# Altium PCB EVB_DBM_ADT07029BM30_V1.0.0.PcbDoc
Units mil, origin at the board's own origin, x right, y up, seen from the top; angles counter-clockwise.
Board outline 7010 x 3937.01 mil, 4 copper layers (TOP, L2, L3, BOTTOM), stack 35.4 mil thick; 120 components, 85 nets, 382 pads, 521 vias.
Unrouted connection lines stored in the file: 447.
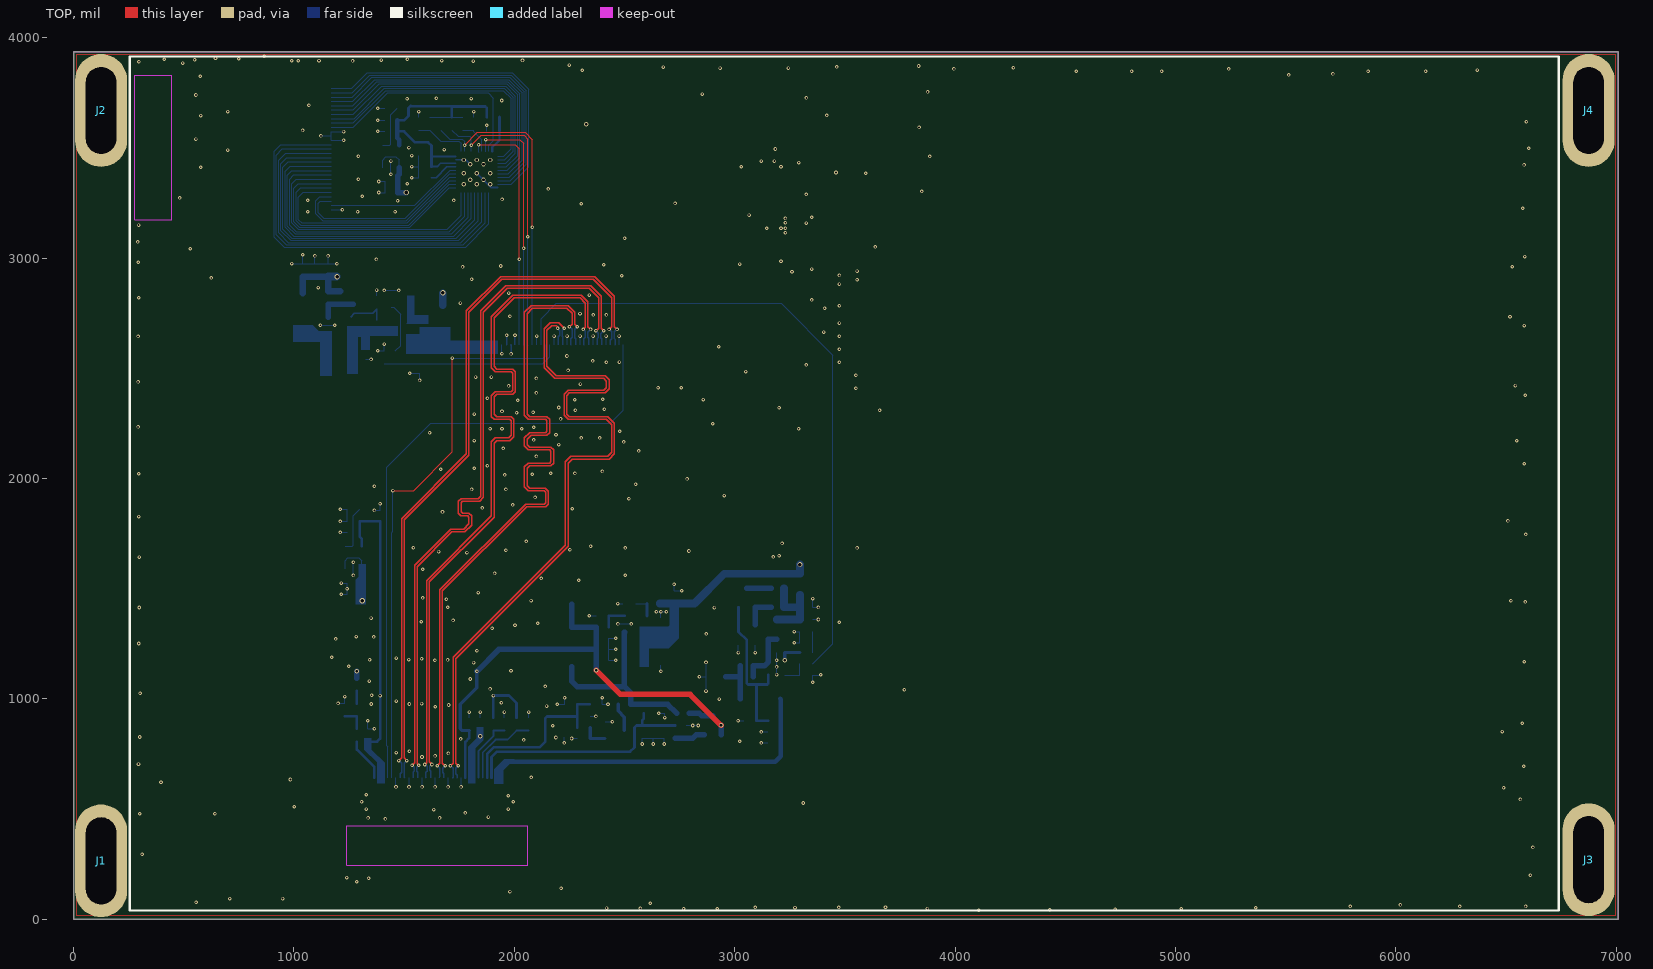
[diagram p0: TOP view]
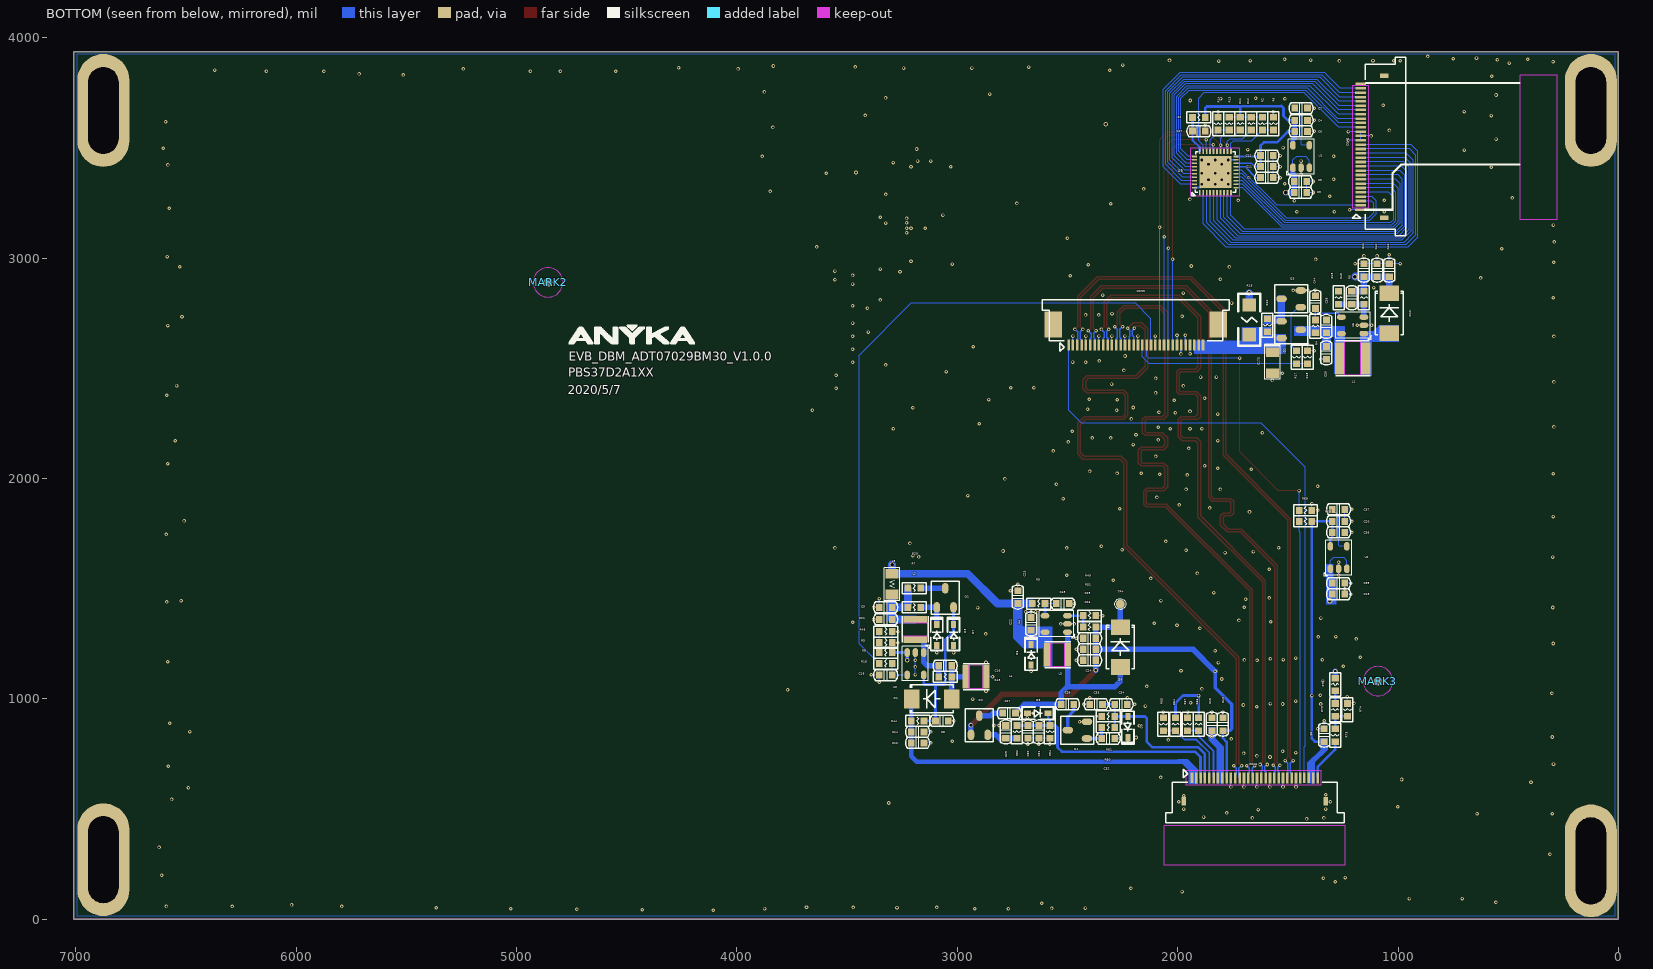
[diagram p1: BOTTOM view, seen from below]
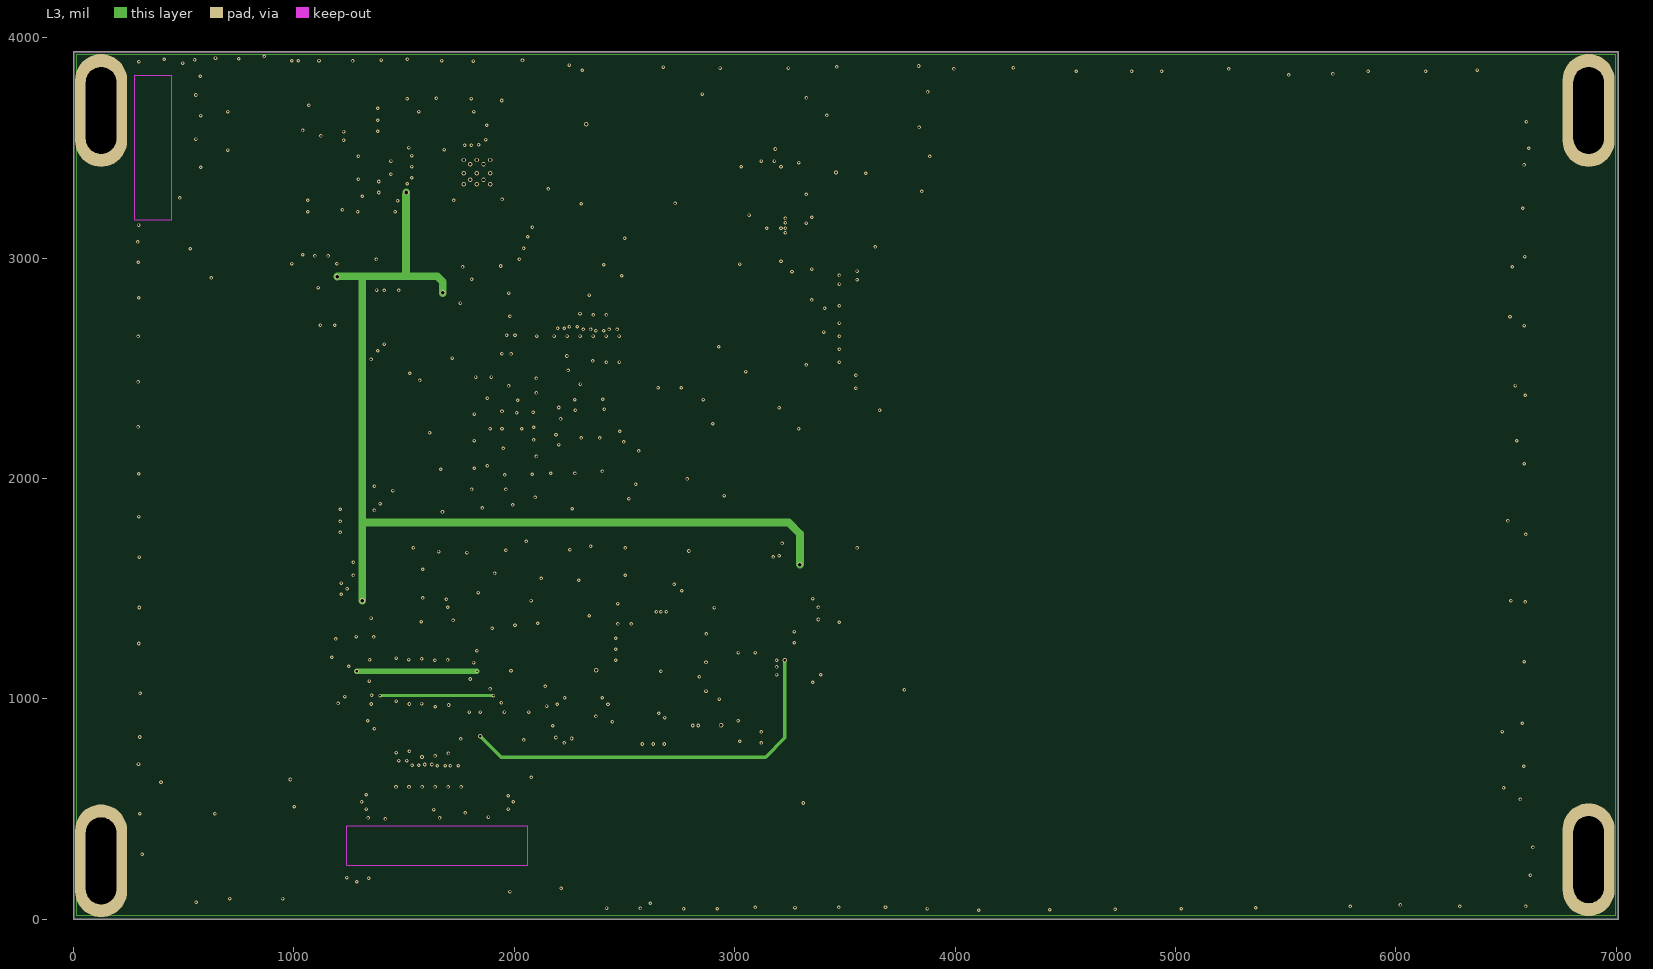
[diagram p2: L3]

## Layer stack, top to bottom
Top Solder: solder mask 0.4, Solder Resist, Dk 3.5
TOP: signal copper 1.35
Dielectric 1: dielectric 10, FR-4, Dk 4.3
L2: signal copper 1.35
Dielectric2: dielectric 10, FR-4, Dk 4.3
L3: signal copper 1.35
Dielectric3: dielectric 10, FR-4, Dk 4.3
BOTTOM: signal copper 1.35
Bottom Solder: solder mask 0.4, Solder Resist, Dk 3.5

## Board outline
0,0 7010,0 7010,3937.01 0,3937.01

## Design rules (kind name [scope] priority, off if disabled: settings)
Clearance "Clearance - Default - DEFAULT- SMD" [IsVia vs IsSMTPin] p1: gap=6 ignorepadtopadclearanceinfootprint=FALSE
Clearance "Clearance - Default - DEFAULT - Via" [IsVia vs IsVia] p2: gap=6 ignorepadtopadclearanceinfootprint=FALSE
Clearance "Clearance - Default - DEFAULT - Net" [All] p3: gap=6 ignorepadtopadclearanceinfootprint=FALSE except(0: Arc-Hole Track-Hole SMDPad-Hole THPad-Hole Via-Hole Fill-Hole Poly-Hole Region-Hole Text-Hole; 5: Arc-Arc Arc-Track Track-Track; 10: Text-Text)
ComponentClearance "ComponentClearance - Default - DEFAULT" [All] p1: gap=6 collisioncheckmode=3 verticalgap=10 showdistances=FALSE
FanoutControl Fanout_Small [(CompPinCount < 5)] p3: bgadir=Out bgaviamode=Centered fanoutstyle=Auto fanoutdirection=OutThenIn viagrid=1 // Fanout_Small (Default Rule)
FanoutControl Fanout_SOIC [IsSOIC] p4: bgadir=Out bgaviamode=Centered fanoutstyle=Auto fanoutdirection=Alternating viagrid=1 // Fanout_SOIC (Default Rule)
HoleToHoleClearance "HoleToHoleClearance - Default - DEFAULT" [All] p1: gap=6 allowstackedmicrovias=TRUE
Length "Default Length" [All] p1: maxlimit=50000 minlimit=0
MaxMinImpedance "Default Impedance" [All] p1: minimum=50.00 maximum=150.0
ParallelSegment "Default Parallel Segment Adjasent" [All] p1: limit=1000 gap=200
ParallelSegment "Default Parallel Segment Same Layer" [All] p2: limit=1000 gap=200
PlaneConnect "Default PlaneConnect" [All] p1: planeconnectstyle=Direct reliefexpansion=20 reliefentries=4 reliefconductorwidth=10 reliefairgap=10
PolygonConnect "PolygonConnect - Default SMT" [IsSMTPin] p1: connectstyle=Direct reliefconductorwidth=10 reliefentries=4 polygonreliefangle="45 Angle" airgapwidth=10
PolygonConnect "PolygonConnect - Default Pad" [All] p2: connectstyle=Direct reliefconductorwidth=10 reliefentries=4 polygonreliefangle="45 Angle" airgapwidth=10
RoutingLayers "RoutingLayers - Default - DEFAULT" [All] p1: top layer_v5=TRUE mid layer 1_v5=TRUE mid layer 2_v5=TRUE bottom layer_v5=TRUE
RoutingPriority "RoutingPriority - Default - DEFAULT" [All] p1: routingpriority=3
RoutingTopology "Default Routing Topology" [All] p1: topology=Shortest
RoutingVias "RoutingVias - Default - DEFAULT" [All] p1: holewidth=8 width=16 viastyle="Through Hole" minholewidth=8 minwidth=16 maxholewidth=8 maxwidth=16
SMDToCorner "SMDToCorner - Default - DEFAULT" [All] p1: distance=60000
SolderMaskExpansion [All] p1: expansion=4 istentingtop=FALSE
Width "Default Width" [All] p1: maxlimit=30 minlimit=6 preferedwidth=6
20 further rules are at their usual default settings.

## Components (designator, comment, footprint, x,y, rotation, side; value= is the part's Value field where it differs from the comment)
C1 "C0603" C0603 1595,3365 r180 bottom
C2 "C0603" C0603 1335,835 r90 bottom
C3 "C0603" C0603 1442.5,3297.5 r0 bottom
C4 "C0603" C0603 1440,3625 r0 bottom
C5 "C0603" C0603 1442.5,3347.5 r0 bottom
C6 "C0603" C0603 1440,3575 r0 bottom
C7 "C0603" C0603 1440,3680 r0 bottom
C8 "C0603" C0603 3070,900 r180 bottom
C9 "C0603" C0603 3325,1415 r0 bottom
C10 "C0603" C0603 3180,800 r180 bottom
C11 "C0603" C0603 1595,3415 r180 bottom
C12 "C0603" C0603 1595,3465 r180 bottom
C13 "C0603" C0603 1795,885 r90 bottom
C14 "C0603" C0603 3180,850 r180 bottom
C15 "C0603" C0603 1845,885 r90 bottom
C16 "C0603" C0603 3055,1150 r180 bottom
C17 "C0603" C0603 1903.75,3576.25 r180 bottom
C18 "C0603" C0603 3325,1108.03 r0 bottom
C19 "C0603" C0603 1270,1475 r0 bottom
C20 "C0603" C0603 1270,1805 r0 bottom
C21 "C0603" C0603 3325,1360.2 r0 bottom
C22 "C0603" C0603 2665,1340 r90 bottom
C23 "C0603" C0603 2725,1461.5 r90 bottom
C24 "C0603" C0603 2400,1175 r0 bottom
C25 "C0603" C0603 2400,1275 r0 bottom
C26 "C0603" C0603 2400,1225 r0 bottom
C27 "C0603" C0603 2765,935 r0 bottom
C28 "C0603" C0603 2500,975 r180 bottom
C29 "C0603" C0603 2780,850 r270 bottom
C30 "C0603" C0603 2680,850 r90 bottom
C31 "C0603" C0603 2630,850 r270 bottom
C32 "C0603" C0603 2315,820 r0 bottom
C33 "C0603" C0603 2370,975 r180 bottom
C34 "C0603" C0603 2257,975 r180 bottom
C35 "C0603" C0603 1270,1525 r0 bottom
C36 "C0603" C0603 1270,1755 r0 bottom
C37 "C0603" C0603 1270,1860 r0 bottom
C38 "C0603" C0603 1325,2690 r90 bottom
C39 "C0603" C0603 1325,2570 r270 bottom
C40 "C0603" C0603 1040,2945 r90 bottom
C41 "C0603" C0603 1155,2945 r90 bottom
C42 "C0603" C0603 1095,2945 r90 bottom
C43 "C0603" C0603 1210,2820 r270 bottom
C44 "C0603" C0603 1375,2800 r270 bottom
C45 "C0603" C0603 2521.5,1432.5 r0 bottom
C173 "C1206_PN" C1206_PN 1570,2525 r180 bottom
CON1 "FPC_PIN30_0MM5_SKY37D" FPC_PIN30_0MM5_SKY37D 1650,602 r180 bottom
CON2 "FPC_PIN30_0MM5_SKY37D" FPC_PIN30_0MM5_SKY37D 1130,3505 r90 bottom
CON9 "CON32_0MM5" CON32_0MM5 2190,2645 r0 bottom
D1 "SS14" SS14 3116,1000 r0 bottom
D2 "BAV-99_SOT23_123" BAV-99_SOT23_123 2900,880 r180 bottom
D3 "UDZS5.6B" UDZS5.6B 3093,1290 r90 bottom
D4 "BAV-99_SOT23_123" BAV-99_SOT23_123 2455,858 r90 bottom
D5 "SS14" SS14 2260,1235 r90 bottom
D6 "UDZS5.6B" UDZS5.6B 2665,1200 r90 bottom
D7 "UDZS5.6B" UDZS5.6B 3017,1290 r90 bottom
D8 "UDZS5.6B" UDZS5.6B 2635,935 r180 bottom
D9 "UDZS5.6B" UDZS5.6B 2226,872.76 r270 bottom
D10 "SS14" SS14 1040,2750 r90 bottom
J1 "SCREWING_H_3MMAA" SCREWING_H_3MMAA 125,265 r0 top
J2 "SCREWING_H_3MMAA" SCREWING_H_3MMAA 125,3670 r0 top
J3 "SCREWING_H_3MMAA" SCREWING_H_3MMAA 6875,270 r0 top
J4 "SCREWING_H_3MMAA" SCREWING_H_3MMAA 6875,3670 r0 top
L1 "L_SWPA4020_4X4MM" L_SWPA4020_4X4MM 1205,2545 r180 bottom
L2 "L_SWPA3012_3X3MM" L_SWPA3012_3X3MM 3191,1315 r270 bottom
L3 "L_SWPA3012_3X3MM" L_SWPA3012_3X3MM 2545,1200 r180 bottom
L4 "L_SWPA3012_3X3MM" L_SWPA3012_3X3MM 2915,1100 r0 bottom
L5 "L1206" L1206 3296,1520 r180 bottom
MARK2 "MARK" MARK 4857,2890 r90 bottom
MARK3 "MARK" MARK 1091,1080 r90 bottom
Q1 "2N3904$2F$PMBT3904_SOT23_BCE_NPN" 2N3904$2F$PMBT3904_SOT23_BCE_NPN 3055,1458.5 r180 bottom
Q2 "AO3415_SOT23_GDS_P" AO3415_SOT23_GDS_P 1485,2675 r270 bottom
Q3 "2N3904$2F$PMBT3904_SOT23_BCE_NPN" 2N3904$2F$PMBT3904_SOT23_BCE_NPN 1485,2815 r90 bottom
R1 "R0603" R0603 1903.75,3638.75 r0 bottom
R2 "R0603" R0603 1616,3610 r90 bottom
R3 "R0603" R0603 3325,1255 r0 bottom
R4 "R0603" R0603 1375,2690 r270 bottom
R5 "R0603" R0603 1155,2820 r270 bottom
R6 "R0603" R0603 1566,3610 r90 bottom
R7 "R0603" R0603 3195,1415 r0 bottom
R8 "R0603" R0603 3325,1210 r180 bottom
R9 "R0603" R0603 2631,1432.5 r180 bottom
R10 "R0603" R0603 1592.5,2695 r90 bottom
R11 "R0603" R0603 1716,3610 r270 bottom
R12 "R0603" R0603 1666,3610 r270 bottom
R13 "R0603" R0603 1766,3610 r90 bottom
R14 "R0603" R0603 1816,3610 r90 bottom
R15 "R0603" R0603 1270,2820 r270 bottom
R16 "R0603" R0603 3325,1160 r180 bottom
R17 "R0603" R0603 1460,2550 r90 bottom
R18 "R0603" R0603 1410,2550 r90 bottom
R19 "R1206" R1206 1675,2720 r270 bottom
R20 "R0603" R0603 3195,1502 r0 bottom
R43 "R0603" R0603 3055,1100 r0 bottom
R44 "R0603" R0603 3180,900 r0 bottom
R45 "R0603" R0603 3325,1305 r0 bottom
R49 "R0603" R0603 2400,1377.4 r0 bottom
R51 "R0603" R0603 2400,1325 r180 bottom
R52 "R0603" R0603 2730,850 r90 bottom
R54 "R0603" R0603 2580,850 r90 bottom
R60 "R0603" R0603 2315,870 r180 bottom
R61 "R0603" R0603 2315,920 r180 bottom
R64 "R0603" R0603 2010,885 r270 bottom
R65 "R0603" R0603 2065,885 r90 bottom
R66 "R0603" R0603 1905,885 r270 bottom
R67 "R0603" R0603 1955,885 r90 bottom
R68 "R0603" R0603 1420,1805 r0 bottom
R69 "R0603" R0603 1419.99,1854.93 r180 bottom
R72 "R0603" R0603 1285,1065 r270 bottom
R73 "R0603" R0603 1285,950 r270 bottom
R74 "R0603" R0603 1230,950 r90 bottom
R75 "R0603" R0603 1285,835 r90 bottom
TP4 "TP40" TP40 2260,1430 r270 bottom
U1 "XC6209F182MR_SOT23-5" XC6209F182MR_SOT23-5 1440,3460 r180 bottom
U2 "XC6209F182MR_SOT23-5" XC6209F182MR_SOT23-5 1270,1640 r180 bottom
U3 "MPS3302_SOT23-5" MPS3302_SOT23-5 3190,1160 r0 bottom
U4 "LMR62421_SOT23-5" LMR62421_SOT23-5 2550,1340 r90 bottom
U5 "ICNT8110" ICNT8110 1900,3300 r0 bottom
U6 "LMR62421_SOT23-5" LMR62421_SOT23-5 1205,2695 r90 bottom
? "LOGO_ANYKA" LOGO_ANYKA 4475,2636 r180 bottom

## Footprints (in the part's own frame and the unit in brackets; to place one, negate y for a bottom-side part, rotate by r counter-clockwise, add the part's x,y. Pads: shape width x height; smd on the part's side, far side on the other; paste and mask are expansions set on the pad)
2N3904$2F$PMBT3904_SOT23_BCE_NPN [mil]
  oval 30x48 smd: B(-38,-43.5) C(0,43.5) E(38,-43.5)
  silkscreen extent -63,-75 63,75
AO3415_SOT23_GDS_P [mil]
  oval 30x48 smd: D(0,43.5) G(-38,-43.5) S(38,-43.5)
  silkscreen extent -63,-75 63,75
BAV-99_SOT23_123 [mil]
  oval 30x48 smd: 1(-38,-43.5) 2(38,-43.5) 3(0,43.5)
  silkscreen extent -63,-75 63,75
C0603 [mil]
  rect 30x32 smd: 1(-29,0) 2(29,0)
  silkscreen extent -55,-25 55,25
C1206_PN [mil]
  rect 60x45 smd: 1(0,47.5) 2(0,-47.5)
  silkscreen extent -35,-75 35,84
CON32_0MM5 [mm]
  rect 0.3x1.25 smd: 1(7.75,1) 2(7.25,1) 3(6.75,1) 4(6.25,1) 5(5.75,1) 6(5.25,1) 7(4.75,1) 8(4.25,1) 9(3.75,1) 10(3.25,1) 11(2.75,1) 12(2.25,1) 13(1.75,1) 14(1.25,1) 15(0.75,1) 16(0.25,1) 17(-0.25,1) 18(-0.75,1) 19(-1.25,1) 20(-1.75,1) 21(-2.25,1) 22(-2.75,1) 23(-3.25,1) 24(-3.75,1) 25(-4.25,1) 26(-4.75,1) 27(-5.25,1) 28(-5.75,1) 29(-6.25,1) 30(-6.75,1) 31(-7.25,1) 32(-7.75,1)
  rect 1.999x3 smd: 33(-9.5,-1.35) 34(9.5,-1.35)
  silkscreen extent -10.75,-4.2 10.8,1.75
FPC_PIN30_0MM5_SKY37D [mm]
  rect 0.3x1.25 smd: 1(-7.239,1.016) 2(-6.75,1) 3(-6.25,1) 4(-5.75,1) 5(-5.25,1) 6(-4.75,1) 7(-4.25,1) 8(-3.75,1) 9(-3.25,1) 10(-2.75,1) 11(-2.25,1) 12(-1.75,1) 13(-1.25,1) 14(-0.75,1) 15(-0.25,1) 16(0.25,1) 17(0.75,1) 18(1.25,1) 19(1.75,1) 20(2.25,1) 21(2.75,1) 22(3.25,1) 23(3.75,1) 24(4.25,1) 25(4.75,1) 26(5.25,1) 27(5.715,1.016) 28(6.223,1.016) 29(6.75,1) 30(7.25,1)
  rect 0.5x1 smd: 31(-8.19,-1.7) 32(8.19,-1.7)
  silkscreen extent -10.25,-4.2 10.3,2
ICNT8110 [mm]
  rect 0.2x0.6 smd paste-0.1 mask-0.1: 1(0,0.1) 2(-0.4,0.1) 3(-0.8,0.1) 4(-1.2,0.1) 5(-1.6,0.1) 6(-2,0.1) 7(-2.4,0.1) 8(-2.8,0.1) 9(-3.2,0.1) 10(-3.6,0.1) 21(-3.6,-4.7) 22(-3.2,-4.7) 23(-2.8,-4.7) 24(-2.4,-4.7) 25(-2,-4.7) 26(-1.6,-4.7) 27(-1.2,-4.7) 28(-0.8,-4.7) 29(-0.4,-4.7) 30(0,-4.7)
  rect 0.6x0.2 smd: 11(-4.2,-0.5) 12(-4.2,-0.9) 13(-4.2,-1.3) 14(-4.2,-1.7) 15(-4.2,-2.1) 16(-4.2,-2.5) 17(-4.2,-2.9) 18(-4.2,-3.3) 19(-4.2,-3.7) 20(-4.2,-4.1) 31(0.6,-4.1) 32(0.6,-3.7) 33(0.6,-3.3) 34(0.6,-2.9) 35(0.6,-2.5) 36(0.6,-2.1) 37(0.6,-1.7) 38(0.6,-1.3) 39(0.6,-0.9) 40(0.6,-0.5)
  rrect0% 3.7x3.7 smd: 41(-1.8,-2.3)
  silkscreen extent -4.15,-4.61 0.94,0.44
L1206 [mil]
  rect 60x45 smd: 1(0,47.5) 2(0,-47.5)
  silkscreen extent -35,-75 35,75
L_SWPA3012_3X3MM [mm]
  rect 0.8x2.7 smd: 1(-1.15,0) 2(1.15,0)
  silkscreen extent -1.5,-1.5 1.5,1.5
L_SWPA4020_4X4MM [mm]
  rect 1.1x3.7 smd: 1(-1.5,0) 2(1.5,0)
  silkscreen extent -2,-2 2,2
LMR62421_SOT23-5 [mil]
  oval 25x40 smd: 1(-37.4,-50) 2(0,-50) 3(37.4,-50) 4(37.4,51.97) 5(-37.4,51.97)
  silkscreen extent -65,-84 59,79
LOGO_ANYKA [mil]
  silkscreen extent -289,-28 284,59
MARK [mm]
  round 1 smd: 1(0,0)
  TOP keep-out region: 1.7,0 1.571,0.651 1.202,1.202 0.651,1.571 0,1.7 0,1.7 -0.651,1.571 -1.202,1.202 -1.571,0.651 -1.7,0 -1.7,0 -1.571,-0.651 -1.202,-1.202 -0.651,-1.571 0,-1.7 0,-1.7 0.651,-1.571 1.202,-1.202 1.571,-0.651 1.7,0
MPS3302_SOT23-5 [mil]
  oval 25x40 smd: 1(-37.4,-50) 2(0,-50) 3(37.4,-50) 4(37.4,51.97) 5(-37.4,51.97)
  silkscreen extent -65,-84 59,79
R0603 [mil]
  rect 30x32 smd: 1(-29,0) 2(29,0)
  silkscreen extent -54,-25 54,25
R1206 [mil]
  rect 60x60 smd: 1(-67.5,0) 2(67.5,0)
  silkscreen extent -118,-50 118,50
SCREWING_H_3MMAA [mm]
  oval 6x13 hole 3.5 slot 10 at 90 deg: 1(0,0)
SS14 [mm]
  rect 1.8x2.2 smd: A(-2.3,0) K(2.3,0)
  silkscreen extent -2.5,-1.6 2.5,1.6
TP40 [mil]
  round 40 smd: 1(0,0)
  silkscreen extent -25,-25 25,25
UDZS5.6B [mm]
  rect 0.8x0.6 smd: 1(-1.2,0) 2(1.2,0)
  silkscreen extent -1.8,-0.7 2,0.7
XC6209F182MR_SOT23-5 [mil]
  oval 25x40 smd: 1(-37.4,-50) 2(0,-50) 3(37.4,-50) 4(37.4,51.97) 5(-37.4,51.97)
  silkscreen extent -65,-84 59,79

## Via types
v1: diameter 16, hole 8, TOP to BOTTOM, 497 vias
v2: diameter 20, hole 12, TOP to BOTTOM, 19 vias
v3: diameter 24, hole 16, TOP to BOTTOM, 5 vias

## Nets (pads, with @x,y where several pads share a name; then routed paths per layer and width w, separated by ;. In a path a pad name is that pad's centre, name@x,y a point inside that pad or via, vN(x,y) a via of type N, cw(c..) or ccw(c..) an arc to the next point about the centre after c; other vN are vias at no path point)
5V: C3.2 C5.2 C19.2 C22.1 C23.1 C35.2 C40.1 C41.1 C42.1 C43.1 D6.2 D10.K L3.1 L5.1 R5.1 R9.1 R19.1 U1.1 U1.3 U2.1 U2.3 U4.5 | length 6665.7
  L3 w6: v3(1195.41,2915.35) v3@1196.15,2916.08
  L3 w35: v3@1196.15,2916.08 1197.34,2917.28 1310,2917.28 ; v3(1310,1445) 1310,1800 ; v3(1510,3297.5) 1508.75,3286.03 1508.75,2917.28 ; v3@1675,2840 1675,2892.28 1650,2917.28 1508.75,2917.28 ; v3(3296,1609.17) 3296,1749 3245,1800 1310,1800 ; 1310,1800 1310,2917.28 ; 1310,2917.28 1508.75,2917.28
  BOTTOM w5: U2.3 1232.6,1627.6 1245,1640 1295,1640 1307.4,1627.6 U2.1 ; C19.2 1310,1475 v3(1310,1445) ; U1.3 1402.6,3445 1417.6,3460 1462.5,3460 1477.4,3445.1 U1.1 ; L3.1 L3.1@2594.51,1195.76 ; L3.1@2605,1150 2605,1185.28 L3.1@2594.51,1195.76 ; D6.2 2668.75,1250.99 2668.75,1296.35 2662.5,1302.6 U4.5 ; C22.1 2656.6,1302.6 U4.5 ; L3.1@2594.51,1195.76 2594.51,1267.54 2601.97,1275 U4.5
  BOTTOM w6: C41.1 C41.1@1155,2916.39 ; v3@1194.76,2916.39 v3(1195.41,2915.35) ; C19.2 C35.2 1299,1553 1307.4,1561.4 U2.1
  BOTTOM w25: U1.1 1477.4,3380 1471.5,3374.1 C5.2 C3.2 v3(1510,3297.5)
  BOTTOM w30: D10.K C40.1 C42.1 C41.1 R5.1 C43.1
  BOTTOM w35: C41.1 1194.37,2916 v3@1194.76,2916.39 ; R19.1 v3@1675,2840 ; R9.1 C23.1 2817.5,1432.5 2952.5,1567.5 L5.1 v3(3296,1609.17)
  other v3: 1676.18,2842.37
$$$2692: C37.2 U2.4 | length 214.5
  BOTTOM w5: U2.4 1265,1691.97 1270,1696.97 1270,1831 C37.2
$$$4330: C44.2 R4.1 U6.4 | length 185
  BOTTOM w6: U6.4 1274.46,2749.89 1356.42,2749.89 C44.2@1375,2768.47 ; R4.1 C44.2@1375,2768.47 ; C44.2 C44.2@1375,2768.47
$$$4844: D10.A L1.2 U6.1
$$$4976: C43.2 R5.2 R15.2 U6.3 | length 173.6
  BOTTOM w25: U6.3 R5.2 C43.2 R15.2
$$$14688: C45.2 R9.2 U4.4 | length 106.6
  BOTTOM w5: C45.2 R9.2
  BOTTOM w15: U4.4 R9.2
$$$15194: C8.1 D7.2 Q1.E R44.1 U3.5 | length 717.5
  BOTTOM w12: Q1.E D7.2 3017,1304 3055,1266 3055,1070 3060,1065 3099,1065 ; R44.1 C8.1 3099,1065 ; U3.5 3152.6,1070 3147.6,1065 3099,1065
$$$15378: C38.1 C39.1 L1.1 Q2.D R4.2 U6.5 | length 254.2
  BOTTOM w5: U6.5 C38.1@1325,2657.6 ; C39.1 C38.1@1325,2657.6 ; Q2.D 1430.75,2664.25 1430.75,2661 R4.2 C38.1 C38.1@1325,2657.6
$$$15436: R72.2 R73.1 | length 57
  BOTTOM w12: R73.1 R72.2
$$$15589: Q2.G Q3.C R10.2 | length 19.8
  BOTTOM w5: Q2.G@1511.99,2705.1 1520.6,2705.1 Q2.G
$$$15644: Q3.B R17.2 | length 232.8
  BOTTOM w5: Q3.B 1453.22,2777 1453.36,2776.86 1484.31,2745.91 1484.31,2603.24 1462.24,2581.18 1462.24,2581.24 R17.2
$$$16113: R49.2 R51.1 U4.3 | length 123.4
  BOTTOM w12: R51.1 R49.2 U4.3
$$$16377: C27.2 D2.3 | length 110.8
  BOTTOM w25: C27.2 2838.5,935 2850,923.5 D2.3
$$$16547: C18.1 R16.2 U3.4 | length 120.6
  BOTTOM w5: U3.4 C18.1 R16.2
$$$16697: C29.2 D2.2 R52.1 | length 138.4
  BOTTOM w25: R52.1 C29.2 2809.5,821 2825,836.5 D2.2
$$$16886: C16.1 L2.2 R43.2 U3.1 | length 266.4
  BOTTOM w25: R43.2 C16.1 3135,1150 3152.6,1167.6 U3.1 3152.6,1269.72 L2.2
$$$17098: C28.2 D4.3 | length 128.4
  BOTTOM w15: C28.2 2471,945 2498.5,917.5 D4.3
$$$17167: C32.2 D4.1 R60.1 | length 117.5
  BOTTOM w15: R60.1 C32.2 D4.1
$$$19028: R73.2 R74.1 R75.2 | length 112
  BOTTOM w12: R74.1 R73.2 R75.2
$$$20137: Q1.C R20.1 | length 111
  BOTTOM w25: Q1.C R20.1
$$$20747: C16.2 D1.A L4.2 R43.1 | length 216
  BOTTOM w25: L4.2 R43.1 ; D1.A 3026,1000.55 R43.1 ; C16.2 R43.1
$$$22232: C9.1 C21.1 L2.1 L5.2 R7.2 R20.2 | length 376.3
  BOTTOM w35: L2.1 3295.92,1360.28 C21.1 C9.1 ; R20.2 R7.2 C9.1 ; L5.2 C9.1
$$$22340: R3.2 R8.1 R45.2 | length 95
  BOTTOM w5: R8.1 R3.2 R45.2
$$$23973: D3.2 Q1.B R7.1 | length 150.8
  BOTTOM w25: D3.2 Q1.B R7.1
$$$26228: C7.2 U1.4 | length 214.5
  BOTTOM w5: U1.4 1435,3511.97 1440,3516.97 1440,3651 C7.2
$$$26806: C17.1 R1.2 U5.30 | length 167.3
  BOTTOM w10: U5.30 1900,3502.5 1932.75,3535.25 C17.1
  BOTTOM w15: C17.1 R1.2
AVDD: C13.1 C24.1 C25.1 C26.1 CON1.9 D2.1 D5.K R51.2 R72.1 TP4.1 | length 2839.6
  TOP w25: v2(2371,1130) 2481,1020 2798,1020 v2(2938,880)
  L3 w25: v2(1285,1125) v1(1830,1125)
  BOTTOM w12: CON1.9 1777.95,805 1795,822.05 C13.1
  BOTTOM w15: C13.1 1764,856 1755,865 1755,975 1830,1050 v1(1830,1125)
  BOTTOM w25: R72.1 v2(1285,1125) ; v1(1830,1125) 1930,1225 C26.1 ; TP4.1 D5.K 2260.55,1325 R51.2 C25.1 C26.1 ; v2(2371,1130) C24.1 C26.1 ; D2.1 v2(2938,880)
AVDD_SW: C27.1 C28.1 D5.A L3.2 U4.1 | length 877.9
  BOTTOM w25: D5.A 2260,1080 2285,1055 2499.72,1055 ; U4.1 2499.72,1302.32 L3.2 2499.72,1055 ; C27.1 2696,975 C28.1 2529,1025.72 2499.72,1055
DSI_TXDN0: CON1.24 CON9.3 | length 3259.3
  TOP w6: v1(1476,720) 1488,732 1488,1818 1782,2112 1782,2760 1938,2916 2364,2916 2454,2826 2454,2689.17 v1(2466,2676)
  BOTTOM w6: v1(1476,720) 1488,708 1488,666 1482,660 1482,642.05 CON1.24 ; CON9.3 2457,2606.88 2457,2631 2454,2634 2454,2665.75 v1(2466,2676)
DSI_TXDN1: CON1.21 CON9.6 | length 3236.7
  TOP w6: v1(1536,699) 1547.1,710.1 1547.1,1605.89 1710.6,1769.4 1710.6,1770 1770,1770 1794,1794 1794,1824 1788,1830 1757.4,1830 1746,1841.4 1746,1896 1758,1908 1836,1908 1848,1920 1848,2760 1962,2874 2345.9,2874 2394.14,2826.14 2394.14,2682 v1(2406,2670)
  BOTTOM w6: v1(1536,699) 1545,690 1545,672.27 1541.73,668.27 CON1.21 ; CON9.6 2396.69,2634 2392.5,2638.19 2392.5,2656.5 v1(2406,2670)
DSI_TXDN2: CON1.18 CON9.9 | length 3240.8
  TOP w6: v1(1593,702) 1602,711 1602,1536 1896,1830 1896,2166 1914,2184 1974,2184 1986,2196 1986,2262 1980,2268 1908,2268 1896,2280 1896,2376 1914,2394 1986,2394 1992,2400 1992,2478 1986,2484 1914,2484 1896,2502 1896,2734 1993,2831 2304.48,2831 2333.48,2802 2333.48,2688.52 v1(2346,2676)
  BOTTOM w6: v1(1593,702) 1605,693 1605,672 1599,666 1599,643.16 CON1.18 ; CON9.9 2337,2606.27 2337,2637 2334,2640 2334,2664 v1(2346,2676)
DSI_TXDN3: CON1.15 CON9.12 | length 3251.4
  TOP w6: v1(1650.05,696) 1662,707.95 1662,1494 2052,1884 2136,1884 2142,1890 2142,1938 2136,1944 2064,1944 2046,1962 2046,2052 2064,2070 2160,2070 2166,2076 2166,2124 2160,2130 2064,2130 2046,2148 2046,2184 2070,2208 2142,2208 2148,2214 2148,2262 2142,2268 2064,2268 2046,2286 2046,2754 2076,2784 2244,2784 2274,2754 2274,2700 v1(2286,2688)
  BOTTOM w6: v1(1650.05,696) 1662.05,684 1662.05,645.52 1659.05,642.52 1659.05,642.17 CON1.15 ; CON9.12 2278.58,2634 2274,2638.58 2274,2676 v1(2286,2688)
DSI_TXDN4: CON1.12 CON9.15 | length 3252.4
  TOP w6: v1(1710,696) 1722,708 1722,1188 2232,1698 2232,2076 2256,2100 2424,2100 2442,2118 2442,2244 2418,2268 2244,2268 2226,2286 2226,2382 2244,2400 2406,2400 2418,2412 2418,2442 2406,2454 2184,2454 2136,2502 2136,2678.53 2163.47,2706 2202,2706 v1(2226,2682)
  BOTTOM w6: v1(1710,696) 1722,684 1722,641.37 CON1.12 ; CON9.15 2220,2606.1 2220,2643 2217,2646 2217,2673 v1(2226,2682)
DSI_TXDP0: CON1.23 CON9.4 | length 3217.7
  TOP w6: v1(1512,720) 1500,732 1500,1812 1794,2106 1794,2754 1944,2904 2358,2904 2442,2820 2442,2688 v1(2430,2676)
  BOTTOM w6: CON1.23 1500,643.73 1500,708 v1(1512,720) ; v1(2430,2676) 2442,2665.94 2442,2634 2436.06,2628.06 CON9.4
DSI_TXDP1: CON1.20 CON9.7 | length 3190.8
  TOP w6: v1(1566,699) 1560,705 1560,1600.1 1716.95,1757.05 1775.05,1757.05 1806,1788 1806,1830 1794,1842 1765.35,1842 1758,1849.35 1758,1890 1764,1896 1842,1896 1860,1914 1860,2754 1968,2862 2340,2862 2382,2820 2382,2682 v1(2370,2670)
  BOTTOM w6: CON1.20 1561.42,667.58 1556.68,672.32 1556.68,690 v1(1566,699) ; v1(2370,2670) 2370,2668.5 2380.5,2658 2380.5,2638.99 2377.01,2635.5 CON9.7
DSI_TXDP2: CON1.17 CON9.10 | length 3197.8
  TOP w6: v1(1626,702) 1627.18,702 1615.05,714.13 1615.05,1531.05 1908,1824 1908,2160 1920,2172 1980,2172 1998,2190 1998,2268 1986,2280 1920,2280 1908,2292 1908,2370 1920,2382 1992,2382 2004,2394 2004,2484 1992,2496 1920,2496 1908,2508 1908,2728.95 1999,2819.95 2299,2819.95 2322,2796 2322,2685 v1(2313,2676)
  BOTTOM w6: CON1.17 1620,641.84 1620,672 1617,675 1617,696 v1(1626,702) ; v1(2313,2676) 2322,2667 2322,2640 2316,2634 2316,2605.63 CON9.10
DSI_TXDP3: CON1.14 CON9.13 | length 3214.1
  TOP w6: v1(1686,696) 1674,708 1674,1489.93 2056.07,1872 2142,1872 2154,1884 2154,1941.58 2139.58,1956 2070,1956 2058,1968 2058,2046 2070,2058 2166,2058 2178,2070 2178,2130 2166,2142 2070,2142 2058,2154 2058,2178 2076,2196 2148,2196 2160,2208 2160,2268 2148,2280 2070,2280 2058,2292 2058,2748 2082,2772 2238.9,2772 2262,2748.9 2262,2700 v1(2250,2688)
  BOTTOM w6: CON1.14 1680,641.84 1680,661.1 1675.1,666 1675.1,684 v1(1686,696) ; v1(2250,2688) 2262,2676 2262,2640 2256,2634 2256,2605.63 CON9.13
DSI_TXDP4: CON1.11 CON9.16 | length 3202
  TOP w6: v1(1746,696) 1734,708 1734,1182 2244,1692 2244,2070 2262,2088 2430,2088 2454,2112 2454,2250 2424,2280 2250,2280 2238,2292 2238,2376 2250,2388 2412,2388 2430,2406 2430,2448 2412,2466 2190,2466 2148,2508 2148,2673 2169,2694 2190,2694 2196,2688 v1(2196,2682)
  BOTTOM w6: CON1.11 1740,641.37 1740,654 1734,660 1734,684 v1(1746,696) ; v1(2196,2682) 2205,2670 2205,2649 2199,2643 2199,2607.79 CON9.16
GND: C1.2 C2.2 C3.1 C4.1 C5.1 C6.1 C7.1 C8.2 C9.2 C10.2 C11.2 C12.2 C13.2 C14.2 C15.2 C17.2 C18.2 C19.1 C20.1 C21.2 C22.2 C23.2 C24.2 C25.2 C26.2 C29.1 C30.1 C31.2 C32.1 C33.1 C34.2 C35.1 C36.1 C37.1 C38.2 C39.2 C40.2 C41.2 C42.2 C44.1 C45.1 C173.2 CON1.10 CON1.13 CON1.16 CON1.19 CON1.22 CON1.25 CON1.31 CON1.32 CON2.1 CON2.17 CON2.18 CON2.19 CON2.30 CON2.31 CON2.32 CON9.2 CON9.5 CON9.8 CON9.11 CON9.14 CON9.17 CON9.21 CON9.26 CON9.27 CON9.28 CON9.29 CON9.33 CON9.34 D3.1 D4.2 D6.1 D7.1 D8.1 D9.2 J1.1 J2.1 J3.1 J4.1 L4.1 Q3.E R3.1 R6.2 R14.2 R15.1 R18.2 R45.1 R49.1 R54.1 R61.1 R65.2 R67.2 R69.2 R74.2 U1.2 U2.2 U3.2 U4.2 U5.19 U5.40 U6.2 | length 4540.8
  BOTTOM w5: v1(990,2975) C40.2 ; v1(1040,3015) C40.2 ; v1(1095,3010) C42.2 ; v1(1120,2695) U6.2 v1(1185,2695) ; v1(1122.5,3554.21) CON2.18 ; v1(1155,3010) C41.2 ; CON2.1 1219.57,3220 v1(1220,3219.57) ; v1(1195,2974) C41.2 ; v1(1200,979) R74.2 v1(1230,1010) ; v1(1210,1755) C36.1 ; v1(1210,1805) C20.1 C37.1 v1(1210,1860) ; v1(1215,1475) C19.1 v1(1241,1500) C35.1 v1(1215,1525) ; v1(1225,3534.53) CON2.17 CON2.18 ; v1(1225,3573.9) CON2.19 CON2.18 ; v1(1270,1560) U2.2 v1(1270,1620) ; v1(1307,533) v1@1307.07,533.07 ; C39.2 1350,2541 v1(1350,2540) ; v1(1335,900) C2.2 v1(1365,864) ; v1(1365,1854.93) R69.2 v1(1390.99,1885) ; C44.1 v1(1375,2855) ; v1(1380,2579) R18.2 v1(1410,2610) ; v1(1380,3575) C6.1 ; v1(1380,3625) C4.1 ; v1(1380,3680) C7.1 ; v1(1385,3297.5) C3.1 C5.1 v1(1385,3347.5) ; v1(1410,2853) Q3.E v1(1475,2853) ; v1(1440,3380) U1.2 v1(1440,3440) ; v1(1462.99,600) CON1.25 ; v1(1522.05,600) CON1.22 ; v1(1525,2477.5) C173.2 v1(1570,2445) ; v1(1535,3365) C1.2 C11.2 ; v1(1535,3415) C11.2 ; C12.2 C11.2 ; R6.2 v1(1566,3665) ; v1(1581.1,600) CON1.19 ; v1(1640.16,600) CON1.16 ; v1(1699.21,600) CON1.13 ; v1(1758.27,600) CON1.10 ; C13.2 v1(1795,940) ; R14.2 v1(1816,3665) ; C15.2 v1(1845,940) ; C17.2 1874.75,3602.5 v1(1875,3602.5) ; v1(1943.94,2566.25) CON9.29 ; R67.2 v1(1955,940) ; CON9.27@1982.5,2605.63 CON9.27 ; v1@1995.43,533.07 v1(1995.5,533) ; R65.2 v1(2065,940) ; CON9.21 v1(2101.42,2646.25) ; CON9.17 v1(2180.16,2646.25) ; v1(2195,975) C34.2 v1(2228,1005) ; v1(2226,800) D9.2 ; CON9.14 v1(2239.21,2646.25) ; v1(2260,820) C32.1 ; CON9.11 v1(2298.27,2646.25) ; v1(2340,1377.4) R49.1 ; R61.1 v1(2370,920) ; CON9.8 v1(2357.32,2646.25) ; v1(2399,1005) C33.1 v1(2425,975) ; D4.2 v1(2445,896) ; CON9.5 v1(2416.38,2646.25) ; v1(2460,1175) C24.2 C26.2 ; v1(2460,1225) C26.2 ; v1(2460,1275) C25.2 C26.2 ; v1(2469.5,1432.5) C45.1 ; v1(2470,1340) U4.2 v1(2530,1340) ; CON9.2 v1(2475.43,2646.25) ; v1(2580,795) R54.1 C31.2 ; v1(2630,795) C31.2 ; v1(2645,1395) v1(2665,1395) ; v1(2655,935) D8.1 v1(2682.24,915) ; v1(2665,1125) D6.1 ; C22.2 v1(2665,1395) ; v1(2680,795) C30.1 C31.2 ; v1(2690,1395) v1(2665,1395) ; v1(2725,1520) C23.2 v1(2760,1490.5) ; C29.1 v1(2810,879) v1(2835,879) ; v1(2840,1100) L4.1 ; v1(2869.72,1035) L4.1 ; v1(2869.72,1165) L4.1 ; v1(3015,900) C8.2 ; v1(3017,1210) D7.1 ; v1(3093,1210) D3.1 ; v1(3120,800) C10.2 ; v1(3120,850) C14.2 ; v1(3190,1110) v1(3190,1145) v1(3190,1175) U3.2 ; v1(3270,1255) R3.1 R45.1 v1(3270,1305) ; v1(3354,1075) C18.2 3389.28,1108.03 v1(3390,1108.75) ; C21.2 v1(3380,1360) ; v1(3354,1455) C9.2 v1(3380,1415) ; C40.2 C42.2 ; C42.2 C41.2
  BOTTOM w6: CON9.28 1965,2605.63 v1(1965,2650) ; CON9.27 1985,2605.63 v1(1985,2565) ; CON9.26 v1(2002.99,2650)
  BOTTOM w8: U5.19 1779.33,3445.67 v2(1800,3425) ; v2(1830,3385) 1895.32,3319.69 U5.40
  other v1: 4107.29,40.46 4429.89,42.67 4725.98,44.88 5026.48,47.09 2767.97,47.77 2921.14,47.77 2571.99,48.72 3874.69,48.43 2418.82,50.63 5364.55,51.51 3273.56,52.52 3093.53,53.38 3471.59,53.38 3684.19,54.24 5793.21,58.14 6290.37,58.14 6588.66,58.14 6020.8,64.77 2616.53,72.87 555.96,77.36 708.46,93.7 948.1,93.7 1980.15,125.56 2211.94,140.57 1285,170 1338.75,185.71 1239.13,189.06 6610.76,199.55 310.87,295.22 6621.81,325.5 1415,455 1336.33,459.65 1660.74,459.65 1882.41,463.45 300.19,478.58 641.48,478.58 1776.92,482.2 1633.85,497.72 1327.56,500 1972.44,500 1001.26,509.78 3311.23,527.26 6565.28,543.59 1972.44,560 1327.56,565 6488.73,596.76 396.71,621.65 984.02,633.89 2076.41,643.36 6580.71,693.61 294.53,703.7 1581.03,736.02 1640.43,740.78 1700.69,752.28 1464,756 1524,762 3022.51,807.61 2042.55,813.24 1757.13,818.23 2188.67,824.53 300.19,826.77 6482.62,851.44 2173.82,877.39 6573.85,889.07 1641.62,963.52 2146.5,967.08 1701.66,972.03 1350.57,976.58 1524.01,976.58 1579.25,978.37 1941.57,982.35 1464.61,989.65 2930.35,999.03 1352.34,1016.7 301.91,1024.99 3770.27,1041.24 1890,1045 2140.71,1056.45 1341.98,1080.39 1800,1090 1984.93,1127.53 1248.35,1148.31 1815.04,1164.34 6582.37,1168.1 1639.8,1175.3 1343.12,1177.03 1696.93,1176.45 1521.3,1177.89 1579.26,1182.22 1464.22,1184.81 1171,1188.27 1830,1218 295.31,1251.08 1189.78,1271.93 1362.15,1280.82 1282.22,1282.31 2870.79,1294.42 1899.02,1320.45 2003.07,1333.98 2106.69,1343.12 3474.29,1347.86 1578,1350 1722,1356 1350.14,1366.26 2907.76,1413.86 298.42,1414.45 1698,1416 6587.01,1439.75 6522.47,1444.84 2076,1446 1692,1452 1584,1458 1836,1482 2292.3,1537.82 2122.61,1546.32 2503.21,1560.86 1910.08,1569.08 1584.46,1588.32 298.42,1643.17 3174.93,1644.16 3201.35,1649.16 1784.68,1663.52 1656,1668 2792.11,1670.75 1962,1674 2252.51,1676.22 2503.21,1684.92 3555,1685 1542,1686 2346,1692 3215,1705 2054.25,1714.31 6589.33,1746.22 6508.37,1807.09 295.31,1826.77 1674,1848 2263.26,1862.77 1854,1866 1992.5,1880 2520,1908 2094,1914 2952.1,1922.38 1806,1950 1962,1950 1365,1965 2550,1974 2784,1998 1956,2016 2081.19,2018.66 295.31,2021.26 2274.98,2022.94 2165.59,2023.92 2399.99,2031.73 1666.24,2041.82 1818,2046 1878,2058 6582.37,2066.63 2100,2100 2565,2125 1950,2136 2202,2154 2496,2166 6549.04,2171.09 1818,2172 2088.23,2174.88 2304,2184 2388,2184 2189.03,2197.77 1615.54,2207.47 2478,2214 3290,2225 1890,2226 1944,2226 2034,2226 2088,2232 292.84,2233.74 2900.07,2248.53 2210,2270 1818,2292 2010,2298 2085,2300 1944,2304 2277,2310 3657.5,2310 2409,2314 3201.37,2320.98 2202,2322 2015,2355 2274,2357 2857.39,2358.08 2401,2359 1878,2364 6587.01,2377.75 2100,2388 3550,2409.57 2652,2412 2757,2412 1974.01,2419.59 6542.5,2421.38 2300,2428 292.84,2438.25 2100,2454 1824,2460 1896,2460 3550,2468.62 3050,2485 2244,2490 3325,2515 2417.87,2527.61 2476.77,2528.02 3475,2527.68 2355.31,2533.36 2238.81,2555.65 3475,2586.73 2928.06,2597.59 292.84,2644.3 3475,2645.79 3403.72,2664.11 6582.37,2693.52 3475,2704.84 6518.04,2733.49 1980,2736 2358,2742 2418,2742 2298,2748 3407.52,2771.87 3475,2783.58 1755.18,2796.04 3350,2810 295.91,2819.59 2340,2832 1975,2841 1110,2866.25 3475,2882.01 3555,2901.69 1806,2904 625,2910 2487,2920 3475,2921.38 3260,2937.5 3555,2941.06 3350,2950 1765,2960 6527.89,2960.21 1938,2964 2406,2970 3023.24,2972.91 293.38,2981.02 3210,2986 1374,2994 6584.69,3006.96 529.67,3042.43 3638.21,3050.53 290.87,3073.1 2500,3090 3230,3115 3145,3135 3210,3135 3230,3135 295,3150 3325,3159 3230,3160 3230,3180 3350,3185 3065,3195 1063.07,3210 1288.61,3209.77 1458.85,3210.63 6576.34,3226.54 2304.13,3246.24 2729.29,3248.14 1470,3260 1724.88,3261.46 1062.5,3262.5 1944.6,3266.22 482.17,3272.74 1310.03,3280.89 3325,3289 3849.19,3302.56 2153.85,3313.77 1513.73,3337.55 1292.67,3357.89 3595,3385 3459.65,3388.28 576.59,3411.95 3030,3414 3210,3414 6581.78,3422.61 3290.46,3433.51 3120,3440 3180,3440 3884.63,3461.4 1292.5,3462.5 1535,3465 700,3490 1682.12,3492.33 3185,3495 6603.57,3498.86 1521.72,3501.32 555,3540 1039.04,3579.07 3836.33,3593.05 6592.68,3618.68 576.59,3646.56 3417.95,3647.14 699.74,3664.6 1067.89,3693.26 1942.95,3714.97 1513.26,3722.8 1804.67,3723.61 1646.6,3725.49 3325.31,3726.61 555,3740 2853.14,3744.21 3875.34,3753.94 575,3825 5514.29,3831.09 5714.76,3835.53 4550.27,3847.43 4800.8,3847.43 4936.96,3847.43 5873.75,3847.43 6135.18,3847.43 2307.66,3852.72 6369.37,3852.88 3994.73,3858.32 5241.96,3858.32 2933.5,3862.2 3243.57,3862.2 4264.7,3863.28 2675.83,3866.56 3462.89,3867.2 3834.1,3871.56 2248.8,3875.93 495,3885 296.49,3890.89 1813.35,3893.85 990,3895 1020,3895 1265.77,3894.55 1113.59,3895.94 1670.2,3895.94 2037.1,3896.63 1396.41,3898.72 549.23,3899.95 1515.06,3901.71 411.54,3902.67 749.42,3904.48 644.05,3907.57 865,3915
  other v2: 1770,3335 1830,3335 1890,3335 1800,3355 1860,3355 1770,3385 1890,3385 1860,3425 1770,3445 1830,3445 1890,3445 2327.02,3606.9
L/R: CON1.6 R66.2 R67.1 | length 292.8
  BOTTOM w8: CON1.6 1837.01,762.01 1905,830 R66.2 R67.1
LCD_POR_EN: CON9.18 R17.1 R18.1 | length 816.4
  BOTTOM w5: R18.1 R17.1 2128.5,2521 2160.47,2552.97 CON9.18
LCD_PWM: CON9.20 R16.1 | length 3007.8
  BOTTOM w5: CON9.20 2121.1,2724.9 2191.23,2795.03 3210.06,2794.94 3445,2560 3445,1250 3355,1160 R16.1
LCD_RESET: CON1.27 CON9.1 | length 2888.4
  BOTTOM w5: CON1.27 1425,782.5 1420,787.5 1420,2050 1620,2250 2435,2250 2494.97,2309.97 CON9.1
LED_A: C10.1 C14.1 CON1.1 CON1.2 D1.K R44.2 | length 1598.2
  BOTTOM w20: CON1.1@1935,641.37 1935.43,641.8 1935.43,680 1970.43,715 3184,715 3209,740 C10.1 C14.1 R44.2 3209,997.55 D1.K
LED_K: C15.1 CON1.7 CON1.8 R8.2 U3.3 | length 1940.2
  L3 w15: v2(1845,830) 1940,735 3140,735 3227.4,822.4 v2(3227.4,1175)
  BOTTOM w15: v2(1845,830) C15.1 ; v2(3227.4,1175) U3.3 R8.2
POWER_IN: C173.1 CON9.30 CON9.31 CON9.32 Q2.S R10.1 R19.2 | length 27.8
  BOTTOM w5: Q2.S 1556.25,2637
RX1: CON2.20 U5.29 | length 1060.1
  BOTTOM w5: CON2.20 1268.58,3593.58 1425,3750 1881.25,3750 1905,3726.25 1905,3532.5 1884.25,3511.75 U5.29
RX2: CON2.21 U5.31 | length 1196.2
  BOTTOM w5: CON2.21 1270,3613.27 1416.73,3760 1950,3760 1985,3725 1985,3495 1951.42,3461.42 U5.31
RX3: CON2.22 U5.32 | length 1231.6
  BOTTOM w5: CON2.22 1272.5,3632.95 1409.55,3770 1955,3770 1995,3730 1995,3485 1955.67,3445.67 U5.32
RX4: CON2.23 U5.33 | length 1267.1
  BOTTOM w5: CON2.23 1270,3652.64 1397.36,3780 1960,3780 2005,3735 2005,3475 1959.92,3429.92 U5.33
RX5: CON2.24 U5.34 | length 1302.5
  BOTTOM w5: CON2.24 1270,3672.32 1387.68,3790 1965,3790 2015,3740 2015,3465 1964.17,3414.17 U5.34
RX6: CON2.25 U5.35 | length 1338
  BOTTOM w5: CON2.25 1267.5,3692.01 1375.49,3800 1970,3800 2025,3745 2025,3455 1968.43,3398.43 U5.35
RX7: CON2.26 U5.36 | length 1373.4
  BOTTOM w5: CON2.26 1267.5,3711.69 1365.81,3810 1975,3810 2035,3750 2035,3445 1972.68,3382.68 U5.36
RX8: CON2.27 U5.37 | length 1408.8
  BOTTOM w5: CON2.27 1263.62,3730 1353.62,3820 1980,3820 2045,3755 2045,3435 1976.93,3366.93 U5.37
RX9: CON2.28 U5.38 | length 1444.1
  BOTTOM w5: CON2.28 1263.94,3750 1343.94,3830 1985,3830 2055,3760 2055,3425 1981.18,3351.18 U5.38
RX10: CON2.29 U5.39 | length 1479.7
  BOTTOM w5: CON2.29 1262.5,3770.75 1331.75,3840 1990,3840 2065,3765 2065,3415 1985.43,3335.43 U5.39
SENSOR_ID1: R2.1 R6.1 U5.21 | length 252.5
  BOTTOM w5: R6.1 R2.1 1667,3530 1748.27,3530 1758.27,3520 U5.21
SENSOR_ID2: R13.1 R14.1 U5.27 | length 161.3
  BOTTOM w5: R13.1 R14.1 1816,3573.89 1852.41,3537.73 1852.76,3537.38 U5.27
STBYB: CON1.26 CON9.19 R68.2 R69.1 | length 2550.3
  TOP w5: v1(1448.99,1945) 1543,1945 1718.75,2120.75 v1(1718.75,2546.25)
  BOTTOM w5: CON1.26 1443.31,1754.31 1449,1760 R68.2 R69.1 ; R69.1 v1(1448.99,1945) ; v1(1718.75,2546.25) 2132.04,2546.25 2140.79,2555 CON9.19
TS_I2C_CLK: CON9.22 R12.2 U5.22 | length 1451
  TOP w5: v1(1774.02,3512.5) 1831.52,3570 2050,3570 2082,3536.25 v1(2082,3140)
  BOTTOM w5: R12.2 1707,3540 1764.02,3540 1774.02,3530 v1(1774.02,3512.5) U5.22 ; CON9.22 2082,2607.65 v1(2082,3140)
TS_I2C_SDA: CON9.23 R11.2 U5.24 | length 1381
  TOP w5: v1(1805.51,3512.5) 1849.26,3556.25 2045,3556.25 2061,3540 v1(2061,3097)
  BOTTOM w5: R11.2 1745,3552 1798,3552 1805.51,3544.49 v1(1805.51,3512.5) U5.24 ; v1(2061,3097) 2061,2604.83 CON9.23
TS_INT: CON9.24 U5.28 | length 1149.3
  TOP w5: v1(1870,3537.5) 2025,3537.5 2042,3520 v1(2042,3045)
  BOTTOM w5: U5.28 1870,3485.04 v1(1870,3537.5) ; v1(2042,3045) 2042,2606.04 2041.25,2605.63 CON9.24
TS_RST: CON9.25 U5.26 | length 1119.9
  TOP w5: v1(1837.5,3513.75) 2005,3513.75 2023,3496.25 v1(2023,2995)
  BOTTOM w5: U5.26 1837.5,3481.1 v1(1837.5,3513.75) ; CON9.25 2023,2606.7 v1(2023,2995)
TS_VDD_3V3: C4.2 C6.2 C11.1 C12.1 R1.1 R2.2 R11.1 R12.1 R13.2 U1.5 U5.18 U5.20 | length 1317.3
  BOTTOM w5: R2.2 R12.1 R11.1 R13.2 ; C12.1@1624,3461.42 C12.1
  BOTTOM w8: C11.1 1650.08,3415 1665,3429.92 U5.18 ; C12.1@1624,3461.42 U5.20
  BOTTOM w12: C6.2 1500,3575 1550,3525 1609,3525 1624,3510 C12.1 ; C4.2 1500,3625 1520,3645 1520,3680 1530,3690 1716,3687.5 ; C11.1 C12.1@1624,3461.42 ; R11.1 1716,3687.5 ; R1.1 1875,3639 1875,3680 1867.5,3687.5 1716,3687.5
  BOTTOM w20: C4.2 C6.2 1469,3545 1477.4,3536.6 U1.5
TX1: CON2.2 U5.16 | length 631.2
  BOTTOM w5: CON2.2 1549.25,3239.25 1708.43,3398.43 U5.16
TX2: CON2.3 U5.15 | length 826.4
  BOTTOM w5: CON2.3 1120,3258.94 1110,3248.94 1110,3205 1135,3180 1505,3180 1707.68,3382.68 U5.15
TX3: CON2.4 U5.14 | length 866.4
  BOTTOM w5: CON2.4 1117.5,3278.62 1100,3261.12 1100,3200 1130,3170 1510,3170 1706.93,3366.93 U5.14
TX4: CON2.5 U5.13 | length 1059.5
  BOTTOM w5: CON2.5 1042.5,3298.31 1020,3275.81 1020,3175 1035,3160 1515,3160 1706.18,3351.18 U5.13
TX5: CON2.6 U5.12 | length 1105.4
  BOTTOM w5: CON2.6 1030,3317.99 1010,3297.99 1010,3170 1030,3150 1520,3150 1705.43,3335.43 U5.12
TX6: CON2.7 U5.11 | length 1149.8
  BOTTOM w5: CON2.7 1020,3337.68 1000,3317.68 1000,3165 1025,3140 1525,3140 1704.69,3319.69 U5.11
TX7: CON2.8 U5.10 | length 1274.7
  BOTTOM w5: CON2.8 1010,3357.36 990,3337.36 990,3160 1020,3130 1695,3130 1758.27,3193.27 U5.10
TX8: CON2.9 U5.9 | length 1346.8
  BOTTOM w5: CON2.9 1000,3377.05 980,3357.05 980,3150 1010,3120 1705,3120 1774.02,3189.02 U5.9
TX9: CON2.10 U5.8 | length 1415.9
  BOTTOM w5: CON2.10 990,3396.73 970,3376.73 970,3145 1005,3110 1715,3110 1789.76,3184.76 U5.8
TX10: CON2.11 U5.7 | length 1483.9
  BOTTOM w5: CON2.11 982.5,3416.42 960,3393.92 960,3140 1000,3100 1725.51,3100 1805.51,3180 U5.7
TX11: CON2.12 U5.6 | length 1554.9
  BOTTOM w5: CON2.12 975,3436.1 950,3411.1 950,3130 990,3090 1736.26,3090 1821.26,3175 U5.6
TX12: CON2.13 U5.5 | length 1623
  BOTTOM w5: CON2.13 967.5,3455.79 940,3428.29 940,3125 985,3080 1747.01,3080 1837.01,3170 U5.5
TX13: CON2.14 U5.4 | length 1692.6
  BOTTOM w5: CON2.14 962.5,3475.47 930,3442.97 930,3115 975,3070 1757.76,3070 1852.76,3165 U5.4
TX14: CON2.15 U5.3 | length 1768
  BOTTOM w5: CON2.15 947.5,3495.16 920,3467.66 920,3105 965,3060 1768.5,3060 1868.5,3160 U5.3
TX15: CON2.16 U5.2 | length 1839.1
  BOTTOM w5: CON2.16 940,3514.84 910,3484.84 910,3095 955,3050 1779.25,3050 1884.25,3155 U5.2
UPDN: CON1.5 R64.2 R65.1 | length 364.8
  BOTTOM w8: CON1.5 1856.69,756.69 1915,815 1969,815 R64.2 R65.1
VCOM: CON1.30 R75.1 | length 197.6
  BOTTOM w12: R75.1 1285,770 1364.57,690.43 CON1.30
VDD5: C1.1 U5.17 | length 131
  BOTTOM w8: C1.1 1645,3365 1694.17,3414.17 U5.17
VDD_1V8: C2.1 C20.2 C36.2 CON1.28 CON1.29 R64.1 R66.1 R68.1 U2.5 | length 2055.8
  L3 w12: v1(1391,1015) v1(1905,1015)
  BOTTOM w12: U2.5 1307.4,1726.6 1299,1735 C36.2 C20.2 R68.1 v1(1391,1015) 1391,820 1377,806 C2.1 ; R66.1 v1(1905,1015) 1975,1015 2010,980 R64.1
VGH: C30.2 C31.1 CON1.3 D8.2 R52.2 R54.2 | length 1098.6
  BOTTOM w12: CON1.3 1896.06,735 1921.06,760 2525,760 2545,780 2545,869 2555,879 R54.2 ; D8.2 2587.76,910 2580,902.24 R54.2 ; R52.2 C30.2 C31.1 R54.2
VGL: C33.2 C34.1 CON1.4 D9.1 R60.2 R61.2 | length 810.8
  BOTTOM w12: CON1.4 1876.38,750 1906.38,780 2115,780 2140,805 2140,911 2149,920 D9.1 R61.2 ; R60.2 R61.2 ; C33.2 C34.1 R61.2
pads on no net: MARK2.1 MARK3.1 U5.1 U5.23 U5.25 U5.41

## Polygon pours and split planes (outlines as drawn)
GND on TOP (solid, remove dead copper, pour order 0): 15,3925 6995,3925 6995,15 15,15
GND on L3 (solid, remove dead copper, pour order 1): 15,3925 6995,3925 6995,15 15,15
GND on BOTTOM (solid, remove dead copper, pour order 2): 6995,15 15,15 15,3925 6995,3925
GND on L2 (solid, remove dead copper, pour order 3): 6995,15 15,15 15,3925 6995,3925

## Keep-outs
BOTTOM:
  region: -8933.99,-16308.08 -8868.99,-16308.08 -8868.99,-16423.08 -8933.99,-16423.08 -8933.99,-16308.08
  region: 1940,3500 1720,3500 1720,3280 1940,3280 1940,3500
  region: 2575,1255 2515,1255 2515,1145 2575,1145 2575,1255
  region: 1960,675 1350,675 1350,607.5 1960,607.5 1960,675
  region: -10268.99,-16988.08 -10148.99,-16988.08 -10148.99,-17048.08 -10268.99,-17048.08 -10268.99,-16988.08
  region: -9948.99,-16988.08 -9828.99,-16988.08 -9828.99,-17053.08 -9948.99,-17053.08 -9948.99,-16988.08
  region: 1205,3785 1135,3785 1135,3225 1205,3225 1205,3785
  region: 1170,2620 1245,2620 1245,2470 1170,2470 1170,2620
  region: 3250,1345 3135,1345 3135,1285 3250,1285 3250,1345
  region: 2945,1155 2885,1155 2885,1045 2945,1045 2945,1155
  region: -9513.99,-16678.08 -9578.99,-16678.08 -9578.99,-16793.08 -9513.99,-16793.08 -9513.99,-16678.08
Keep-Out Layer:
  lines w5: 0,0 0,3937.01 7010,3937.01 7010,0 0,0 ; 277,3175 277,3830 445,3830 445,3175 277,3175 ; 1240,245 1240,425 2060,425 2060,245 1240,245

## Other copper
BOTTOM:
  region net $$$15378: 1241.77,2690.79 1470.12,2690.79 1470.12,2647.48 1344.13,2647.48 1344.13,2584.49 1304.76,2584.49 1304.76,2643.54 1289.02,2643.54 1289.02,2474.25 1241.77,2474.25 1241.77,2690.79
  region net LED_K: 1792,782 1792,617 1822.5,617 1822.5,775 1860,812.5 1860,870 1830,870 1830,820 1792,782
  region net VDD_1V8: 1320,820 1320,770 1378.5,711.5 1378.5,617.5 1411,617.5 1411,709 1350,770 1350,820 1320,820
  region net $$$4844: 997.68,2694.72 1084.29,2694.72 1111.85,2667.17 1170.91,2667.17 1170.91,2466.38 1119.72,2466.38 1119.72,2619.92 997.68,2619.92 997.68,2694.72
  region net 5V: 1295,1610 1325,1610 1325,1430 1280,1430 1280,1540 1295,1555 1295,1610
  region net 5V: 2705,1450 2705,1335 2697.5,1327.5 2570,1327.5 2570,1145 2610,1145 2610,1230 2700,1230 2745,1275 2745,1450 2705,1450
  region net $$$15589: 1515,2828.58 1545,2828.58 1545,2740 1610,2740 1610,2702.5 1515,2702.5 1515,2828.58
  region net POWER_IN: 1510,2655 1570,2655 1570,2685 1710,2685 1710,2625 1925,2625 1925,2565 1510,2565 1510,2655
  region net LED_A: 2000,725 1955,725 1910,680 1910,615 1950,615 1950,675 2000,725

## Silkscreen, mask and mechanical layers (free items; w line width, h text height)
Top Overlay:
  lines w10: 255,40 255,3915 6739,3915 6739,40 255,40
Bottom Overlay:
  lines w10: 450,3425 985,3425 1025,3385 1025,3219.4 1149,3219.4 ; 450,3795 1145,3795
  text "EVB_DBM_ADT07029BM30_V1.0.0" at 4763,2534 h40
  text "PBS37D2A1XX" at 4766,2461 h40
  text "2020/5/7" at 4768,2383 h40
Top Solder:
  region: 2178.6,3250 2178.6,3787 5639,3787 5639,3250 2178.6,3250
  region: 435,3800.65 972,3800.65 972,196.25 435,196.25 435,3800.65
  region: 2109.6,275 2109.6,812 5570,812 5570,275 2109.6,275
  region: 5744,3780 6281,3780 6281,145 5744,145 5744,3780
Bottom Assembly:
  text "R19" at 1660,2705 h20 r270